# EAGLE board Analog_Light_Project_Improved_PCB (EAGLE 9.2.2)
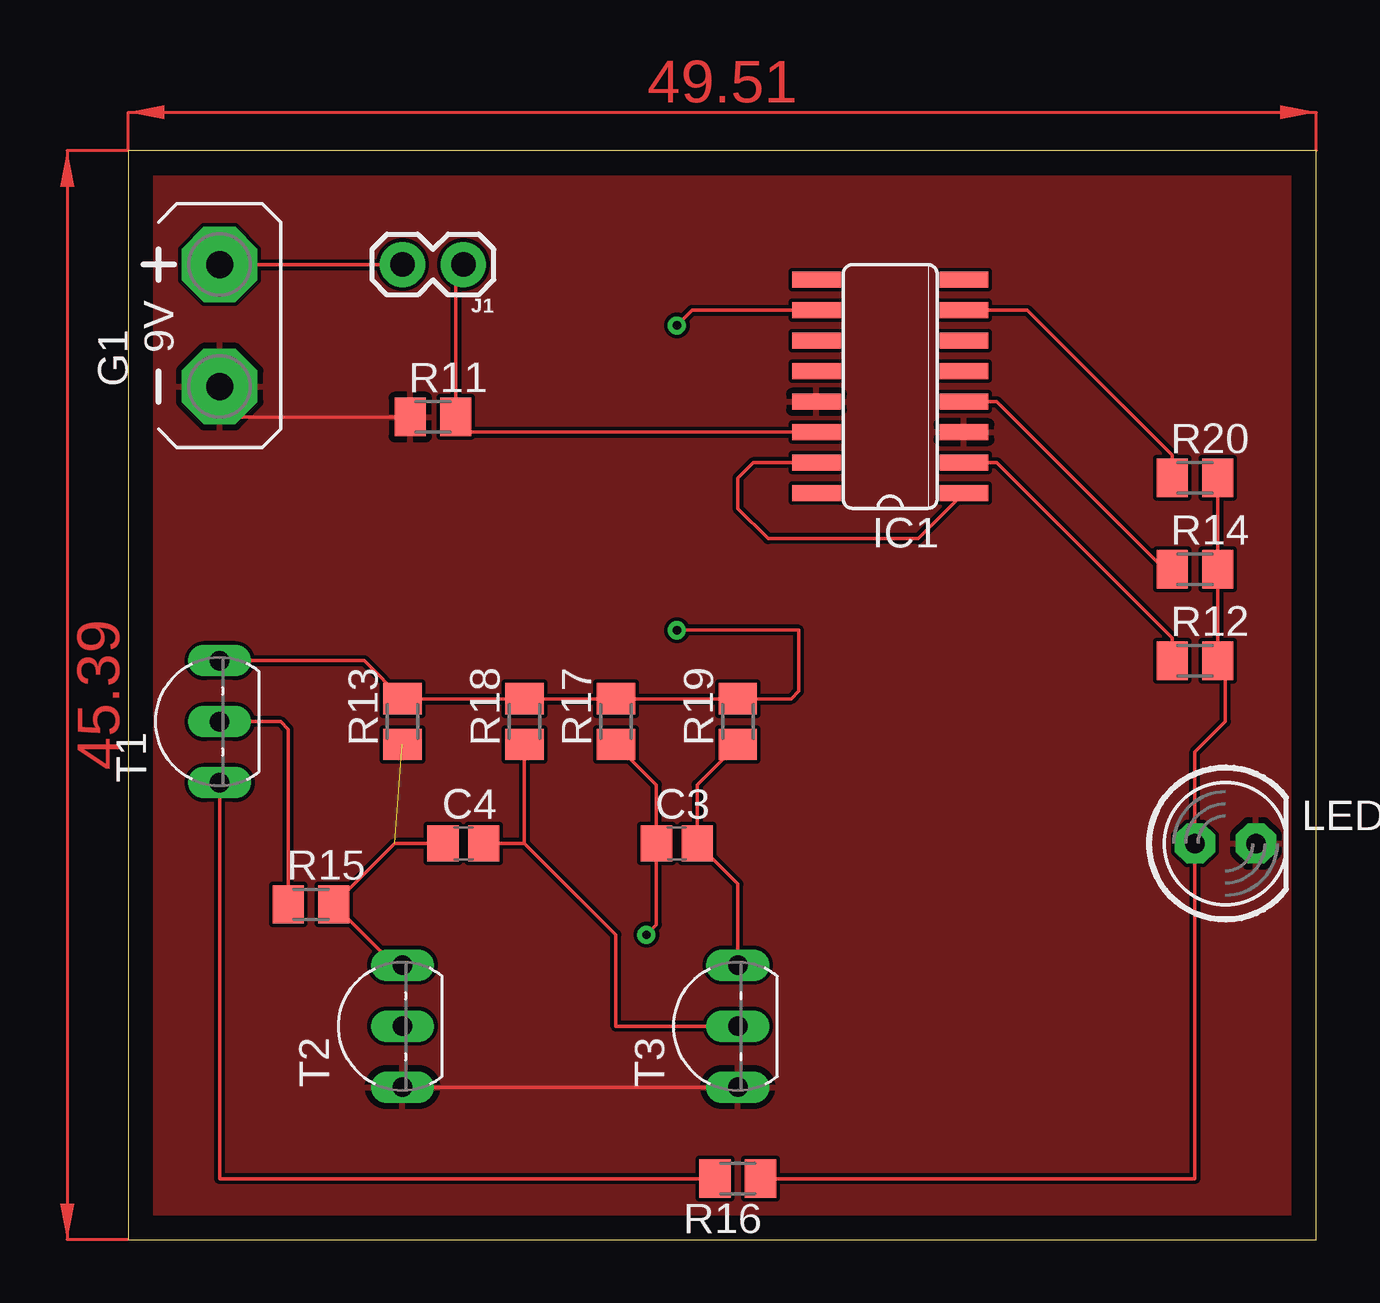
[diagram p0: board, top side]
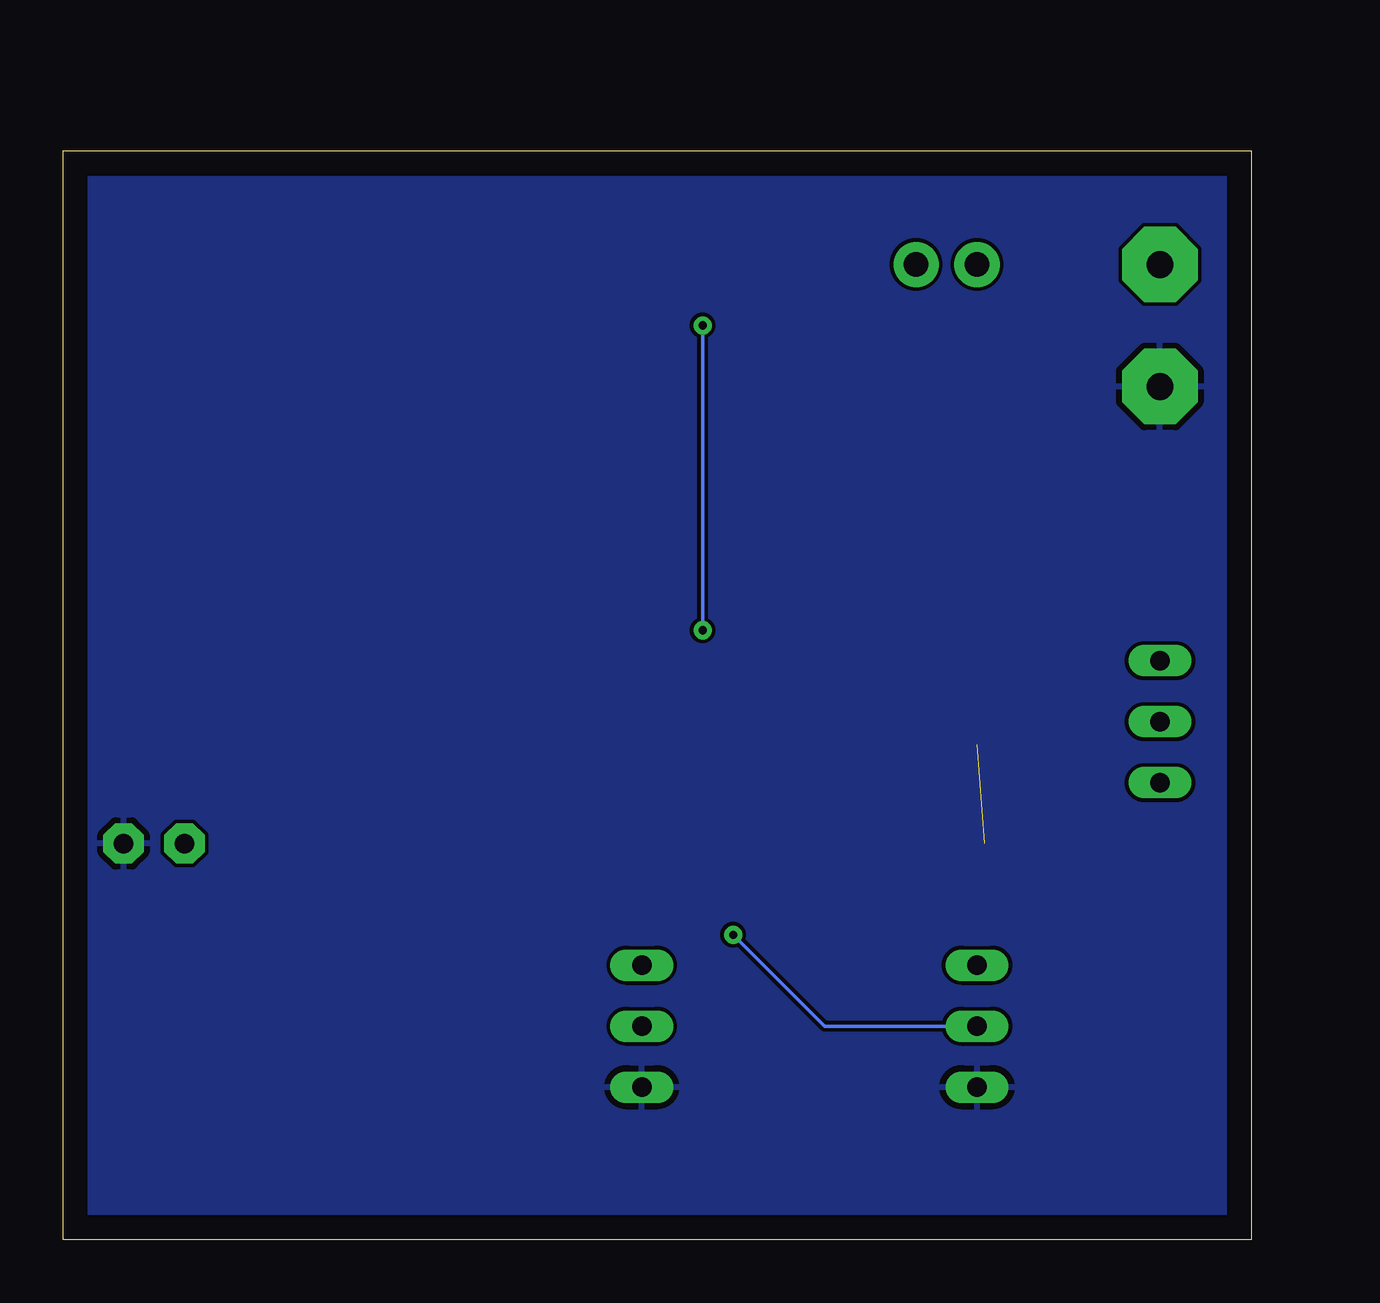
[diagram p1: board, bottom side, seen from below]

Size 49.51 x 45.39 mm. Coordinates in mm from the lower left corner, seen from the top.
Outline: 0,0 49.51,0 49.51,45.39 0,45.39 0,0
Copper layers (1*16): Top 0.035mm / dielectric 1.5mm / Bottom 0.035mm
Design rules "default": minimum track width 6mil, minimum drill 0.35mm, track to track 6mil, track to pad 6mil, pad to pad 6mil, via to via 6mil, smd to smd 6mil, copper to edge 40mil, drill to drill 6mil, minimum pad ring 10mil, minimum via ring 8mil, stop-mask expansion 4mil, vias tented up to drill 0mil, thermal gap 10mil

## Footprints (pad centres in the part's own frame; a part is rotated, then mirrored left to right if it is on the bottom)
C0805 = smd 1.3 x 1.5: 1 -0.85,0; 2 0.85,0
AB9V = drill 1.118 pad 3.15 octagon: + 0,2.54; - 0,-2.54
SO16 = smd 0.66 x 2.032: 1 -4.445,-3.073; 2 -3.175,-3.073; 3 -1.905,-3.073; 4 -0.635,-3.073; 5 0.635,-3.073; 6 1.905,-3.073; 7 3.175,-3.073; 8 4.445,-3.073; 9 4.445,3.073; 10 3.175,3.073; 11 1.905,3.073; 12 0.635,3.073; 13 -0.635,3.073; 14 -1.905,3.073; 15 -3.175,3.073; 16 -4.445,3.073
1X02 = drill 1.016 pad 1.88: 1 0,0; 2 2.54,0
LED5MM = drill 0.813 pad 1.676 octagon: A -1.27,0; K 1.27,0
M0805 = smd 1.3 x 1.6: 1 -0.95,0; 2 0.95,0
TO92-EBC-OVAL = drill 0.813 long: B 0,-1.27; C 2.54,-1.27; E -2.54,-1.27

## Placement (x,y rotation side)
C3  [C0805]  22.86,16.51 0 top
C4  [C0805]  13.97,16.51 0 top
G1  AB9V  [AB9V]  3.81,38.1 0 top
IC1  4017D  [SO16]  31.75,35.56 90 top
J1  [1X02]  13.97,40.64 180 top
LED1  [LED5MM]  45.72,16.51 0 top
R11  [M0805]  12.7,34.29 0 top
R12  [M0805]  44.45,24.13 0 top
R13  [M0805]  11.43,21.59 90 top
R14  [M0805]  44.45,27.94 0 top
R15  [M0805]  7.62,13.97 0 top
R16  [M0805]  25.4,2.54 180 top
R17  [M0805]  20.32,21.59 90 top
R18  [M0805]  16.51,21.59 90 top
R19  [M0805]  25.4,21.59 90 top
R20  [M0805]  44.45,31.75 0 top
T1  2N2222  [TO92-EBC-OVAL]  2.54,21.59 90 top
T2  2N2222  [TO92-EBC-OVAL]  10.16,8.89 90 top
T3  2N2222  [TO92-EBC-OVAL]  24.13,8.89 90 top

## Library data of the parts
C3 C4 LED1 R11-R20 T1-T3 = adafruit
G1 = battery
IC1 = 40xx
J1 = SparkFun-Connectors

## Nets
GND: G1.- IC1.3 IC1.13 LED1.K R11.1 T2.E T3.E
N$1: IC1.10 R13.2 R17.2 R18.2 R19.2 T1.C
N$2: C4.1 R13.1 R15.2 T2.C
N$3: C4.2 R18.1 T3.B
N$4: C3.1 R17.1 T2.B
N$5: C3.2 R19.1 T3.C
N$6: IC1.7 R20.1
N$7: R15.1 T1.B
N$8: R16.2 T1.E
N$9: LED1.A R12.2 R14.2 R16.1 R20.2
N$10: IC1.4 R14.1
N$11: IC1.2 R12.1
N$13: IC1.1 IC1.15
N$14: G1.+ J1.2
N$15: IC1.14 J1.1 R11.2
VDD: IC1.16
VSS: IC1.8

## Tracks (layer width: path | path; a pad name or v marks a point on that pad's centre or on a via)
GND
  Top 0.152: G1.- 3.81,34.29 R11.1 | T2.E T3.E
  pour Bottom: -1.27,44.45 156.21,44.45 156.21,-53.34 -1.27,-53.34
  pour Top: -1.27,44.45 156.21,44.45 156.21,-53.34 -1.27,-53.34
N$1  (via drill 0.35)
  Top 0.152: T1.C 9.84,24.13 R13.2 R18.2 | R18.2 R17.2 | R18.2 R19.2 | R18.2 27.62,22.54 27.94,22.86 27.94,25.4 v22.86,25.4 | v22.86,38.1 23.5,38.73 IC1.10
  Bottom 0.152: v22.86,25.4 v22.86,38.1
N$2  (1 unrouted)
  Top 0.152: T2.C 11.11,11.43 R15.2 11.11,16.51 C4.1
N$3
  Top 0.152: 16.51,16.51 C4.2 | R18.1 16.51,16.51 | T3.B 20.32,8.89 20.32,12.7 16.51,16.51
N$4  (via drill 0.35)
  Top 0.152: R17.1 22.01,18.95 C3.1 22.01,13.12 v21.59,12.7
  Bottom 0.152: T2.B 17.78,8.89 v21.59,12.7
N$5
  Top 0.152: R19.1 23.71,18.95 C3.2 25.4,14.82 T3.C
N$6
  Top 0.152: IC1.7 37.47,38.73 43.5,32.7 R20.1
N$7
  Top 0.152: R15.1 6.67,21.27 6.35,21.59 T1.B
N$8
  Top 0.152: R16.2 3.81,2.54 T1.E
N$9
  Top 0.152: R20.2 R14.2 R12.2 45.72,23.81 45.72,21.59 44.45,20.32 LED1.A 44.45,2.54 R16.1
N$10
  Top 0.152: IC1.4 36.2,34.92 43.18,27.94 R14.1
N$11
  Top 0.152: IC1.2 36.2,32.39 43.5,25.08 R12.1
N$13
  Top 0.152: IC1.15 26.04,32.39 25.4,31.75 25.4,30.48 26.67,29.21 32.92,29.21 IC1.1
N$14
  Top 0.152: 4.52,41.35 G1.+ J1.2
N$15
  Top 0.152: 13.65,36.51 R11.2 | J1.1 13.65,40.32 R11.2 | R11.2 14.29,33.66 IC1.14
(copper drawn outside any net)
  shapes: Top area x2